# EAGLE board SolenoidX13 (EAGLE 9.6.2)
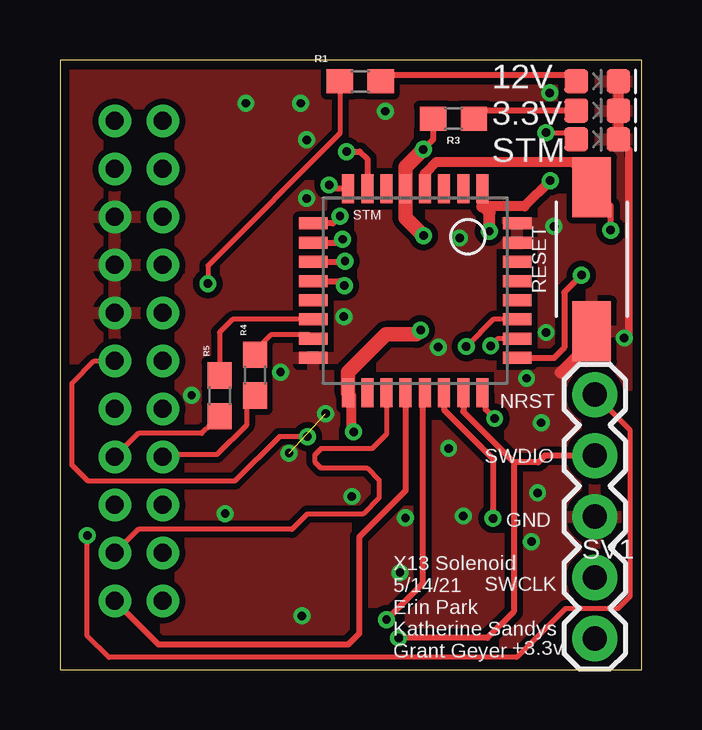
[diagram p0: board, top side]
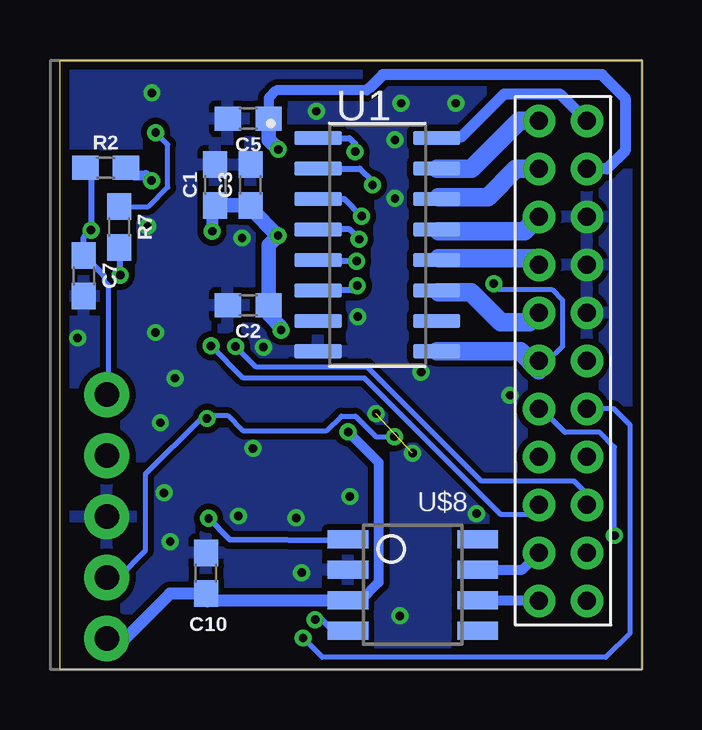
[diagram p1: board, bottom side, seen from below]

Size 24.26 x 25.4 mm. Coordinates in mm from the lower left corner, seen from the top.
Outline: 0,0 24.26,0 24.26,25.4 0,25.4 0,0
Copper layers (1*16): Top 0.0356mm / dielectric 1.5011mm / Bottom 0.0356mm
Design rules "seniordesign": minimum track width 8mil, minimum drill 13mil, track to track 8mil, track to pad 8mil, pad to pad 6mil, via to via 8mil, smd to smd 6mil, copper to edge 15mil, drill to drill 8mil, minimum pad ring 7mil, minimum via ring 7mil, stop-mask expansion 3mil, vias tented up to drill 0mil, thermal gap 10mil

## Footprints (pad centres in the part's own frame; a part is rotated, then mirrored left to right if it is on the bottom)
0603 = smd 1.1 x 1: 1 -0.85,0; 2 0.85,0
LED-0603 = smd 1 x 1: A -0.877,0; C 0.877,0
DISCRETECOMPONENTS_SW_2512 = smd 2.5 x 1.6: 1 -3,0; 2 3,0
STM32F042K6T6 = smd 1.2 x 0.5: NRST 0,3.2; PA0 0,1.6; PA1 0,0.8; PA2 0,0; PA8 8.5,0.8; PA9 8.5,1.6; PA10 8.5,2.4; PA11 8.5,3.2; PA12 8.5,4; PA13 8.5,4.8; PA14 8.5,5.6; PF0-OSC_IN 0,4.8; PF1-OSC_OUT 0,4; VDD 0,5.6; VDDA 0,2.4; VDDIO2 8.5,0 | smd 0.5 x 1.2: PA3 1.45,-1.45; PA4 2.25,-1.45; PA5 3.05,-1.45; PA6 3.85,-1.45; PA7 4.65,-1.45; PA15 7.05,7.05; PB0 5.45,-1.45; PB1 6.25,-1.45; PB3 6.25,7.05; PB4 5.45,7.05; PB5 4.65,7.05; PB6 3.85,7.05; PB7 3.05,7.05; PB8-BOOT0 2.25,7.05; VSS 7.05,-1.45; VSS1 1.45,7.05
1X05 = drill 1.016 pad 1.88: 1 0,0; 2 2.54,0; 3 5.08,0; 4 7.62,0; 5 10.16,0
ULN2003V12 = smd 1.97 x 0.6: 1 -2.475,4.445; 2 -2.475,3.175; 3 -2.475,1.905; 4 -2.475,0.635; 5 -2.475,-0.635; 6 -2.475,-1.905; 7 -2.475,-3.175; 8 -2.475,-4.445; 9 2.475,-4.445; 10 2.475,-3.175; 11 2.475,-1.905; 12 2.475,-0.635; 13 2.475,0.635; 14 2.475,1.905; 15 2.475,3.175; 16 2.475,4.445
MMS-111-01-DV = drill 0.75 pad 1.35: 1 0,0; 2 0,2; 3 2,0; 4 2,2; 5 4,0; 6 4,2; 7 6,0; 8 6,2; 9 8,0; 10 8,2; 11 10,0; 12 10,2; 13 12,0; 14 12,2; 15 14,0; 16 14,2; 17 16,0; 18 16,2; 19 18,0; 20 18,2; 21 20,0; 22 20,2
TCAN337D = smd 1.7 x 0.75: CANH 5.4,2.54; CANL 5.4,1.27; FAULT 5.4,0; GND 0,2.54; RXD 0,0; S 5.4,3.81; TXD 0,3.81; VCC 0,1.27

## Placement (x,y rotation side)
C1  4.7uF  [0603]  17.78,20.19 90 bottom
C2  0.1uF  [0603]  16.41,15.19 180 bottom
C3  0.1uF  [0603]  16.31,20.19 90 bottom
C5  0.1uF  [0603]  16.41,22.96 180 bottom
C7  0.1uF  [0603]  23.27,16.41 270 bottom
C10  0.1uF  [0603]  18.16,4.01 90 bottom
D1  Green  [LED-0603]  22.4,22.1 0 top
D2  Orange  [LED-0603]  22.4,23.29 0 top
D4  Red  [LED-0603]  22.4,24.51 0 top
R1  680  [0603]  12.52,24.51 180 top
R2  10k  [0603]  22.35,20.9 0 bottom
R3  82  [0603]  16.41,22.96 180 top
R4  4.7k  [0603]  8.13,12.27 270 top
R5  4.7k  [0603]  6.65,11.4 270 top
R7  470  [0603]  21.79,18.44 270 bottom
RESET  [DISCRETECOMPONENTS_SW_2512]  22.17,17.09 90 top
STM  STM32F042K6T6  [STM32F042K6T6]  12.01,20.04 270 top
SV1  3V3 -SWCLK-GND-SWDIO- NRST  [1X05]  22.3,1.3 90 top
U1  ULN2003V12  [ULN2003V12]  11.02,17.7 0 bottom
U$1  SOL-TO-BKP  [MMS-111-01-DV]  2.29,22.86 270 top
U$8  TCAN337D  [TCAN337D]  12.24,1.63 0 bottom

## Library data of the parts
C1-C3 C5 C7 C10 = SparkFun-Capacitors; PROD_ID: CAP-08280
D1 D2 D4 = SparkFun-LED
R1 = SparkFun-Resistors; PROD_ID: RES-09333
R2 = SparkFun-Resistors; PROD_ID: RES-07856
R3 = SparkFun-Resistors; PROD_ID: RES-12311
R4 R5 = SparkFun-Resistors; PROD_ID: RES-07857
R7 = SparkFun-Resistors
RESET = Push button - FSM2JMTR
STM U$8 = PI_Shield_Library
SV1 = CONN, Serial Wire Programming Headers
U1 = ULN2003V12; A1_MIN: 0.25; A_MAX: 1.75; A_MIN: 1.75; A_NOM: 1.75; B_MAX: 0.51; B_MIN: 0.33; B_NOM: 0.42; D2_MAX: 0.0; D_MAX: 10.0; D_MIN: 9.8; D_NOM: 9.9; E1_MAX: 4.0; E1_MIN: 3.8; E1_NOM: 3.9; E2_MAX: 0.0; ENOM: 1.27; E_MAX: 6.2; E_MIN: 5.8; E_NOM: 6.0; L_MAX: 1.27; L_MIN: 0.38; L_NOM: 0.825; MANUFACTURER: Diodes Inc.; PIN_COUNT: 16.0; SNAPEDA_PACKAGE_ID: 27538; STANDARD: IPC 7351B
U$1 = Solenoid-Backplane Connector

## Nets
12V: R1.2 U1.9 U$1.12
+3V3: C1.1 C2.1 C3.1 C5.1 C10.1 R2.2 R3.2 STM.VDD STM.VDDA STM.VDDIO2 SV1.1 U$1.3 U$8.VCC
ALERT1: STM.PB4 U$1.17
ALERT2: STM.PB3 U$1.18
C2_1: R5.2 U$1.15
C2_2: R4.2 U$1.16
CAN_H: U$1.20 U$8.CANH
CAN_L: U$1.22 U$8.CANL
CAN_RX: STM.PA11 U$8.RXD
CAN_TX: STM.PA12 U$8.TXD
CLK: STM.PA9 U$1.19
DATA: STM.PA10 U$1.21
GND: C1.2 C2.2 C3.2 C5.2 C7.2 C10.2 D1.C D2.C D4.C RESET.1 STM.PB8-BOOT0 STM.VSS STM.VSS1 SV1.3 U1.8 U$1.5 U$1.7 U$1.9 U$8.GND
GPIO1: STM.PA1 U1.1
GPIO2: STM.PA2 U1.2
GPIO3: STM.PA3 U1.3
GPIO4: STM.PA4 U1.4
GPIO5: STM.PA5 U1.5
GPIO6: STM.PA6 U1.6
LED: R7.2 STM.PA15
N$1: R4.1 STM.PB1
N$2: R5.1 STM.PB0
N$24: D1.A R7.1
N$25: D4.A R1.1
N$27: D2.A R3.1
NRST: C7.1 R2.1 RESET.2 STM.NRST SV1.5 U$1.14
SOL1_1: U1.16 U$1.1
SOL2_1: U1.15 U$1.2
SOL3_1: U1.14 U$1.4
SOL4_1: U1.13 U$1.6
SOL5_1: U1.12 U$1.8
SOL6_1: U1.11 U$1.10
SWCLK: STM.PA14 SV1.2 U$1.11
SWDIO: STM.PA13 SV1.4 U$1.13

## Tracks (layer width: path | path; a pad name or v marks a point on that pad's centre or on a via)
12V  (via drill 0.35)
  Top 0.203: R1.2 11.67,22.34 6.17,16.84 v6.17,16.08
  Bottom 0.203: v6.17,16.08 6.17,16.03 5.97,15.84 3.75,15.84 3.31,15.39 3.31,13.47 3.3,13.46 3.9,12.86 | 3.9,12.86 4.29,12.48 | 3.9,12.86 U$1.12
  Bottom 0.762: 4.29,12.48 5.07,13.26 U1.9
+3V3  (via drill 0.35)
  Top 0.254: R3.2 15.56,22.08 v15.15,21.68
  Top 0.406: 17.61,19.3 17.74,19.3 19.37,19.3 v20.44,20.37 | STM.VDDIO2 12.14,11.41 12.14,10.01 v12.24,9.91
  Top 0.508: STM.VDD 17.61,19.3 | 17.74,19.3 17.74,19.22 17.91,19.05 v17.91,18.26
  Top 0.61: v15.15,21.68 14.41,20.94 STM.VDDA 14.41,18.83 v15.16,18.09 | STM.VDDIO2 12.01,12.39 13.59,13.97 14.86,13.97 v15.04,14.15
  Bottom 0.406: U$8.VCC 11.71,2.9 10.97,3.64 10.97,8.64 v12.24,9.91 | R2.2 21.2,20.6 20.67,20.6 v20.44,20.37 | 11.35,24.23 11.46,24.13 15.24,24.13 15.56,23.81 R3.2
  Bottom 0.457: 11.35,24.23 10.79,24.79 1.66,24.79 0.69,23.81 0.69,21.63 1.45,20.86 U$1.3
  Bottom 0.508: C10.1 17.89,2.9 U$8.VCC | C10.1 18.12,2.83 | v17.91,18.26 17.91,19.22 C1.1 | C10.1 19.67,3.16 21.54,1.29 SV1.1
  Bottom 0.61: R3.2 15.56,22.08 v15.15,21.68 | C1.1 C3.1 16.31,19.22 15.18,18.09 v15.16,18.09 15.56,17.69 C2.1 15.56,14.8 15.04,14.28 v15.04,14.15
ALERT1  (via drill 0.35)
  Top 0.203: STM.PB4 18.07,14.59 v16.94,13.46
  Bottom 0.203: v16.94,13.46 16.1,12.62 11.46,12.62 6.68,7.85 2.82,7.85 2.29,7.32 U$1.17
ALERT2  (via drill 0.35)
  Top 0.203: STM.PB3 18.26,13.79 v17.96,13.49
  Bottom 0.203: v17.96,13.49 16.61,12.14 11.56,12.14 5.89,6.47 4.67,6.47 U$1.18
C2_1
  Top 0.203: R5.2 5.92,9.84 3.27,9.84 U$1.15
C2_2
  Top 0.203: R4.2 7.77,11.06 7.77,10.19 6.54,8.95 4.38,8.95 U$1.16
CAN_H
  Bottom 0.406: U$8.CANH 4.98,4.17 U$1.20
CAN_L
  Bottom 0.406: U$8.CANL 4.32,2.9 U$1.22
CAN_RX  (via drill 0.35)
  Top 0.254: v13.61,2.08 15.11,3.58 15.11,11.19 15.21,11.29 STM.PA11
  Bottom 0.254: U$8.RXD 12.88,1.63 13.34,2.08 v13.61,2.08
CAN_TX  (via drill 0.35)
  Top 0.254: STM.PA12 16.01,10.83 18.06,8.79 v18.06,6.3
  Bottom 0.254: U$8.TXD 12.32,5.36 17.18,5.42 v18.06,6.3
CLK
  Top 0.203: STM.PA9 13.61,9.8 13.03,9.22 10.9,9.22 10.62,8.94 10.62,8.66 10.87,8.41 12.8,8.41 13.31,7.9 13.31,7.16 12.63,6.48 10.31,6.48 9.68,5.84 3.27,5.84 U$1.19
DATA
  Top 0.254: STM.PA10 14.41,7.46 12.47,5.51 12.47,1.5 12.01,1.04 4.11,1.04 U$1.21
GND  (via drill 0.35)  (1 unrouted)
  Top 0.305: D1.C 23.72,21.65 23.72,14.02 v23.52,13.82 | RESET.1 22.17,13.66
  Top 0.406: D4.C D2.C D1.C
  Top 0.508: 22.17,13.66 20.88,12.37
  other vias: 19.46,12.14 20.07,10.29 14.18,4.04 16.21,9.22 6.89,6.5 20.42,24.03 14.4,6.32 19.66,5.33 9.55,9.02 16.82,6.4 13.57,23.27 20.6,18.47 10.29,22.07 20.27,14.05 15.78,13.44 9.2,12.4 10.09,2.24 10.29,19.63 12.17,7.21 11.08,10.67 7.75,23.6 10.04,23.6 5.49,11.43 11.84,14.71 16.67,17.98 19.92,7.37
  pour Bottom (isolate 0.254): -2.03,32 -2.03,-1.27 -1.27,-2.03 35.56,-2.03 36.83,-0.76 36.83,30.73 34.04,33.53 25.91,33.53 -0.51,33.53
  pour Top (isolate 0.254): -0.51,34.8 -3.05,32.26 -3.05,-1.27 -1.02,-3.3 35.31,-3.3 38.1,-0.51 38.1,31.24 33.78,35.56 0.25,35.56
GPIO1  (via drill 0.35)
  Top 0.254: v11.95,21.58 12.51,21.58 12.81,21.28 STM.PA1
  Bottom 0.254: U1.1 12.19,22.15 11.95,21.91 v11.95,21.58
GPIO2  (via drill 0.35)
  Top 0.254: STM.PA2 11.38,20.04 v11.23,20.19
  Bottom 0.254: U1.2 11.76,20.88 11.23,20.34 v11.23,20.19
GPIO3  (via drill 0.35)
  Top 0.254: v11.68,18.89 11.38,18.59 STM.PA3
  Bottom 0.254: U1.3 12.4,19.61 v11.68,18.89
GPIO4  (via drill 0.35)
  Top 0.254: STM.PA4 11.64,17.79 v11.79,17.93
  Bottom 0.254: v11.79,17.93 12.19,18.34 U1.4
GPIO5  (via drill 0.35)
  Top 0.254: STM.PA5 11.86,16.99 v11.89,17.02
  Bottom 0.254: v11.89,17.02 13.45,17.02 U1.5
GPIO6  (via drill 0.35)
  Top 0.254: STM.PA6 11.67,16.19 v11.86,16
  Bottom 0.254: v11.86,16 12.06,15.8 U1.6
LED  (via drill 0.35)
  Top 0.254: STM.PA15 20.61,12.99 21.03,13.41 21.03,15.72 v21.74,16.43
  Bottom 0.254: v21.74,16.43 21.74,17.54 R7.2
N$1
  Top 0.203: STM.PB1 10.41,13.94 8.79,13.94 8.13,13.28 R4.1
N$2
  Top 0.203: STM.PB0 7.2,14.59 6.66,14.05 R5.1
N$24  (via drill 0.35)
  Top 0.203: v20.27,22.38 21.25,22.38 D1.A
  Bottom 0.203: R7.1 20.56,19.29 19.76,20.09 19.76,21.87 v20.27,22.38
N$25
  Top 0.254: D4.A 21.27,24.77 13.37,24.77 R1.1
N$27
  Top 0.254: D2.A 17.59,23.29 R3.1
NO
  cutout Bottom: 15.8,21.39 15.8,20.73 15.77,20.7 15.75,20.73 15.75,21.31 15.8,21.36
NRST  (via drill 0.35)
  Top 0.203: v1.14,5.59 1.14,1.4 2.03,0.51 19.05,0.51 21.08,2.54 23.27,2.54 23.77,3.05 23.77,9.98 SV1.5
  Top 0.254: v22.96,18.31 22.96,19.33 22.2,20.09 RESET.2
  Top 0.406: RESET.2 22.17,20.35 21.36,21.16 15.71,21.16 15.21,20.66 STM.NRST
  Bottom 0.203: v1.14,5.59 1.14,9.27 1.75,9.88 3.2,9.88 4.18,10.86 U$1.14 | SV1.5 22.23,11.53 22.23,15.99 22.4,16.16 22.4,16.39 22.44,16.43
  Bottom 0.254: R2.1 22.95,20.65 22.95,18.33 v22.96,18.31 23.27,18.01 C7.1 22.44,16.43
SOL1_1
  Bottom 0.457: U1.16 8.5,22.2 7.52,22.2 5.73,23.99 3.42,23.99 U$1.1
SOL2_1
  Bottom 0.762: U1.15 7.09,20.88 5.11,22.86 U$1.2
SOL3_1
  Bottom 0.61: U1.14 8.47,19.68
  Bottom 0.762: 8.47,19.68 6.41,19.68 5.24,20.86 U$1.4
SOL4_1
  Bottom 0.61: U1.13 8.47,18.26
  Bottom 0.762: U$1.6 4.88,18.26 8.47,18.26
SOL5_1
  Bottom 0.61: U1.12 8.47,17.14
  Bottom 0.762: U$1.8 4.57,17.14 8.47,17.14
SOL6_1
  Bottom 0.61: U1.11 8.47,15.72
  Bottom 0.762: 8.47,15.72 7.13,15.72 5.88,14.47 4.67,14.47 U$1.10
SWCLK  (via drill 0.35)
  Top 0.203: v10.32,9.71 9.15,9.71 7.29,7.85 1.17,7.85 0.51,8.51 0.51,11.94 1.43,12.86 U$1.11
  Top 0.254: STM.PA14 17.74,11.41 17.74,10.85 v18.12,10.46
  Bottom 0.203: v10.32,9.71 11.08,9.71 11.94,10.56 12.53,10.56 13.13,9.95 16.63,9.95 17.27,10.59 18,10.59 v18.12,10.46 18.38,10.46 20.7,8.14 20.7,4.95 21.82,3.83 SV1.2
SWDIO  (via drill 0.35)
  Top 0.254: STM.PA13 16.81,10.74 18.92,8.64 | 18.92,8.64 18.92,2.41 17.83,1.32 v14.12,1.32 | SV1.4 20.22,8.91 19.94,8.64 18.92,8.64
  Bottom 0.203: v14.12,1.32 13.31,0.51 1.5,0.51 0.48,1.52 0.48,10.19 1.16,10.86 U$1.13

## Text on the board
tNames: 12V / 3.3V / STM | NRST | SWDIO | GND | SWCLK | +3.3v | X13 Solenoid / 5/14/21 / Erin Park / Katherine Sandys / Grant Geyer